# EAGLE board QRE1113 Line Sensor Breakout - Analog-Panelv12 (EAGLE 6.4), part 1 of 2
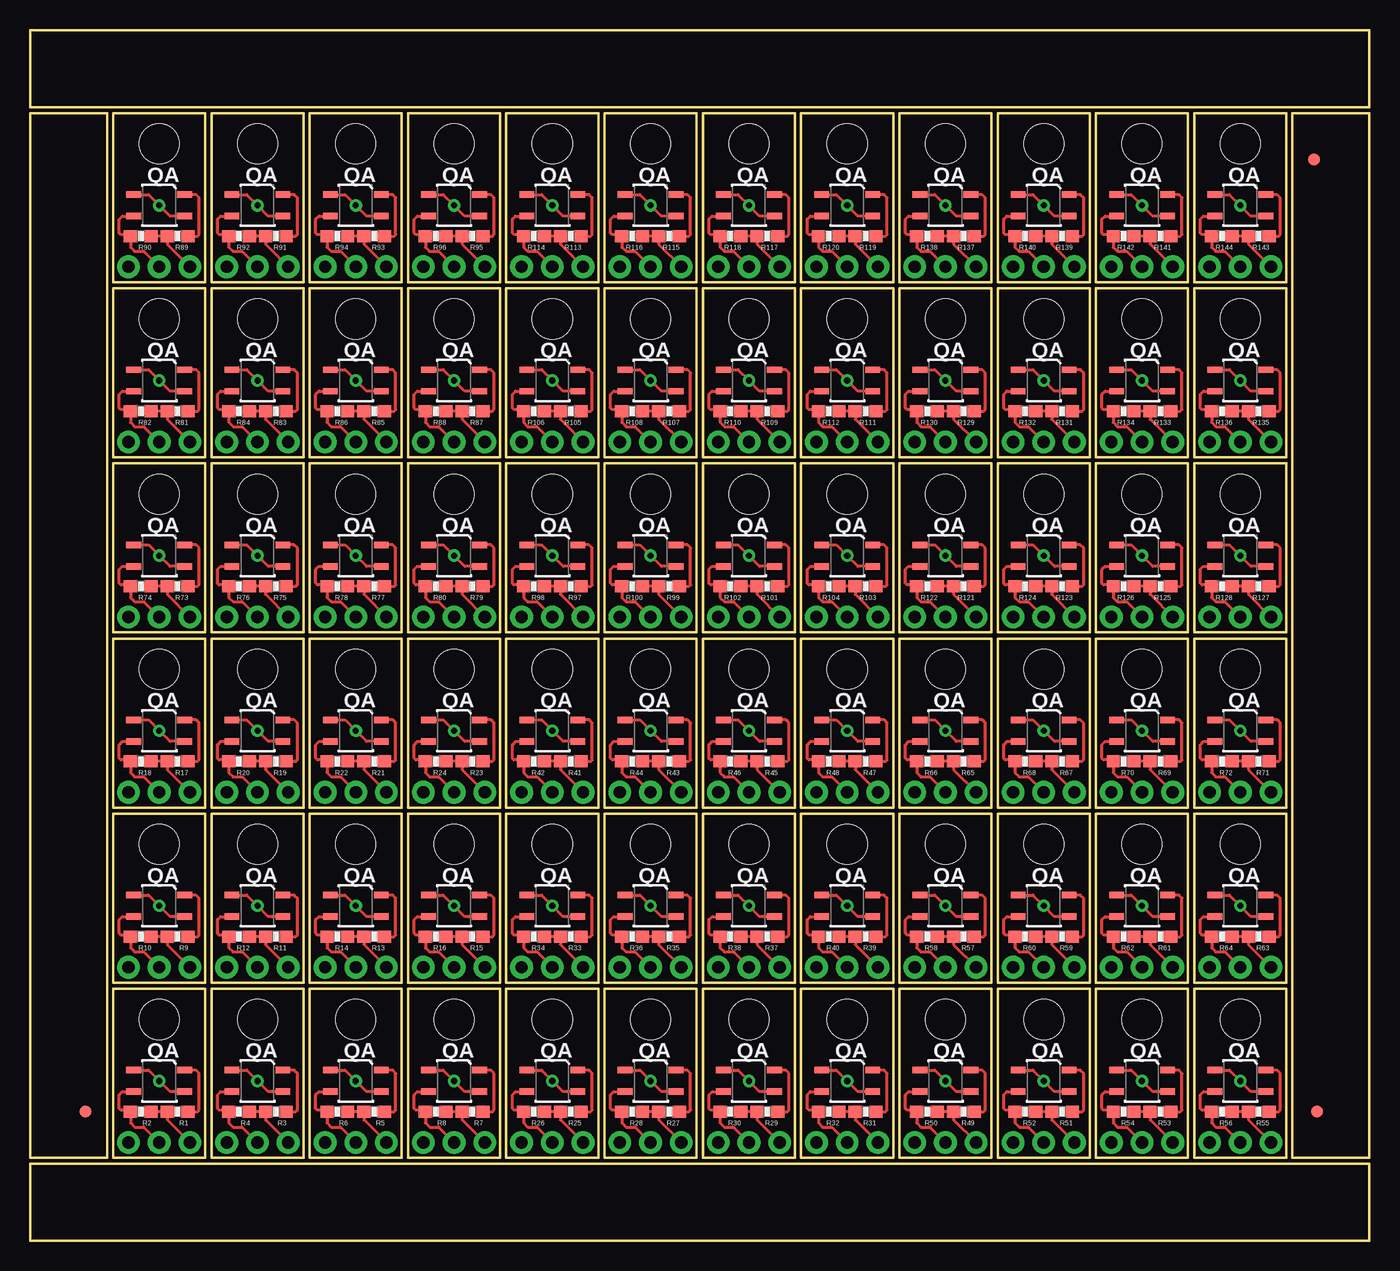
[diagram p0: board, top side]
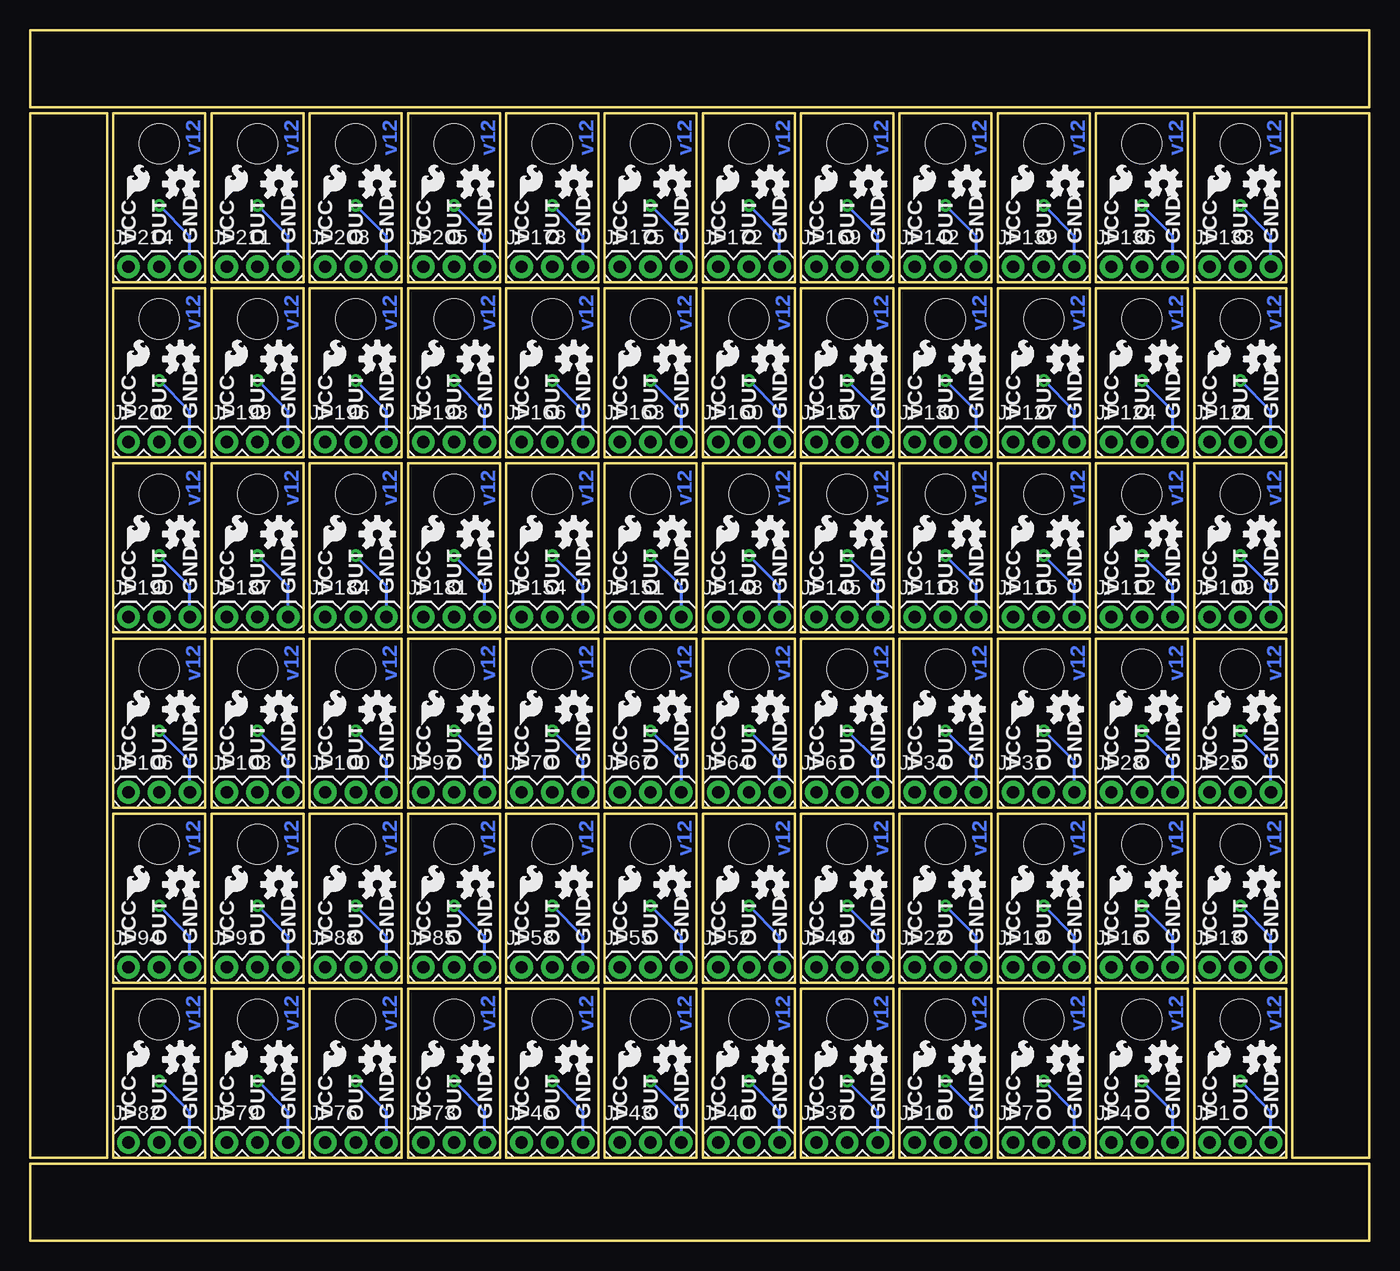
[diagram p1: board, bottom side, seen from below]

Size 110.74 x 100.08 mm. Coordinates in mm from the lower left corner, seen from the top.
Outline: 29.72,6.35 0,6.35 0,0 110.74,0 110.74,6.35 14.99,6.35
Outline: 81.03,93.73 110.74,93.73 110.74,100.08 0,100.08 0,93.73 95.76,93.73
Outline: 6.86,6.86 14.48,6.86 14.48,20.83 6.86,20.83 6.86,6.86
Outline: 14.99,6.86 22.61,6.86 22.61,20.83 14.99,20.83 14.99,6.86
Outline: 23.11,6.86 30.73,6.86 30.73,20.83 23.11,20.83 23.11,6.86
Outline: 31.24,6.86 38.86,6.86 38.86,20.83 31.24,20.83 31.24,6.86
Outline: 6.86,21.34 14.48,21.34 14.48,35.31 6.86,35.31 6.86,21.34
Outline: 14.99,21.34 22.61,21.34 22.61,35.31 14.99,35.31 14.99,21.34
Outline: 23.11,21.34 30.73,21.34 30.73,35.31 23.11,35.31 23.11,21.34
Outline: 31.24,21.34 38.86,21.34 38.86,35.31 31.24,35.31 31.24,21.34
Outline: 6.86,35.81 14.48,35.81 14.48,49.78 6.86,49.78 6.86,35.81
Outline: 14.99,35.81 22.61,35.81 22.61,49.78 14.99,49.78 14.99,35.81
Outline: 23.11,35.81 30.73,35.81 30.73,49.78 23.11,49.78 23.11,35.81
Outline: 31.24,35.81 38.86,35.81 38.86,49.78 31.24,49.78 31.24,35.81
Outline: 39.37,6.86 46.99,6.86 46.99,20.83 39.37,20.83 39.37,6.86
Outline: 47.5,6.86 55.12,6.86 55.12,20.83 47.5,20.83 47.5,6.86
Outline: 55.63,6.86 63.25,6.86 63.25,20.83 55.63,20.83 55.63,6.86
Outline: 63.75,6.86 71.37,6.86 71.37,20.83 63.75,20.83 63.75,6.86
Outline: 39.37,21.34 46.99,21.34 46.99,35.31 39.37,35.31 39.37,21.34
Outline: 47.5,21.34 55.12,21.34 55.12,35.31 47.5,35.31 47.5,21.34
Outline: 55.63,21.34 63.25,21.34 63.25,35.31 55.63,35.31 55.63,21.34
Outline: 63.75,21.34 71.37,21.34 71.37,35.31 63.75,35.31 63.75,21.34
Outline: 39.37,35.81 46.99,35.81 46.99,49.78 39.37,49.78 39.37,35.81
Outline: 47.5,35.81 55.12,35.81 55.12,49.78 47.5,49.78 47.5,35.81
Outline: 55.63,35.81 63.25,35.81 63.25,49.78 55.63,49.78 55.63,35.81
Outline: 63.75,35.81 71.37,35.81 71.37,49.78 63.75,49.78 63.75,35.81
Outline: 71.88,6.86 79.5,6.86 79.5,20.83 71.88,20.83 71.88,6.86
Outline: 80.01,6.86 87.63,6.86 87.63,20.83 80.01,20.83 80.01,6.86
Outline: 88.14,6.86 95.76,6.86 95.76,20.83 88.14,20.83 88.14,6.86
Outline: 96.27,6.86 103.89,6.86 103.89,20.83 96.27,20.83 96.27,6.86
Outline: 71.88,21.34 79.5,21.34 79.5,35.31 71.88,35.31 71.88,21.34
Outline: 80.01,21.34 87.63,21.34 87.63,35.31 80.01,35.31 80.01,21.34
Outline: 88.14,21.34 95.76,21.34 95.76,35.31 88.14,35.31 88.14,21.34
Outline: 96.27,21.34 103.89,21.34 103.89,35.31 96.27,35.31 96.27,21.34
Outline: 71.88,35.81 79.5,35.81 79.5,49.78 71.88,49.78 71.88,35.81
Outline: 80.01,35.81 87.63,35.81 87.63,49.78 80.01,49.78 80.01,35.81
Outline: 88.14,35.81 95.76,35.81 95.76,49.78 88.14,49.78 88.14,35.81
Outline: 96.27,35.81 103.89,35.81 103.89,49.78 96.27,49.78 96.27,35.81
Outline: 6.86,50.29 14.48,50.29 14.48,64.26 6.86,64.26 6.86,50.29
Outline: 14.99,50.29 22.61,50.29 22.61,64.26 14.99,64.26 14.99,50.29
Outline: 23.11,50.29 30.73,50.29 30.73,64.26 23.11,64.26 23.11,50.29
Outline: 31.24,50.29 38.86,50.29 38.86,64.26 31.24,64.26 31.24,50.29
Outline: 6.86,64.77 14.48,64.77 14.48,78.74 6.86,78.74 6.86,64.77
Outline: 14.99,64.77 22.61,64.77 22.61,78.74 14.99,78.74 14.99,64.77
Outline: 23.11,64.77 30.73,64.77 30.73,78.74 23.11,78.74 23.11,64.77
Outline: 31.24,64.77 38.86,64.77 38.86,78.74 31.24,78.74 31.24,64.77
Outline: 6.86,79.25 14.48,79.25 14.48,93.22 6.86,93.22 6.86,79.25
Outline: 14.99,79.25 22.61,79.25 22.61,93.22 14.99,93.22 14.99,79.25
Outline: 23.11,79.25 30.73,79.25 30.73,93.22 23.11,93.22 23.11,79.25
Outline: 31.24,79.25 38.86,79.25 38.86,93.22 31.24,93.22 31.24,79.25
Outline: 39.37,50.29 46.99,50.29 46.99,64.26 39.37,64.26 39.37,50.29
Outline: 47.5,50.29 55.12,50.29 55.12,64.26 47.5,64.26 47.5,50.29
Outline: 55.63,50.29 63.25,50.29 63.25,64.26 55.63,64.26 55.63,50.29
Outline: 63.75,50.29 71.37,50.29 71.37,64.26 63.75,64.26 63.75,50.29
Outline: 39.37,64.77 46.99,64.77 46.99,78.74 39.37,78.74 39.37,64.77
Outline: 47.5,64.77 55.12,64.77 55.12,78.74 47.5,78.74 47.5,64.77
Outline: 55.63,64.77 63.25,64.77 63.25,78.74 55.63,78.74 55.63,64.77
Outline: 63.75,64.77 71.37,64.77 71.37,78.74 63.75,78.74 63.75,64.77
Outline: 39.37,79.25 46.99,79.25 46.99,93.22 39.37,93.22 39.37,79.25
Outline: 47.5,79.25 55.12,79.25 55.12,93.22 47.5,93.22 47.5,79.25
Outline: 55.63,79.25 63.25,79.25 63.25,93.22 55.63,93.22 55.63,79.25
Outline: 63.75,79.25 71.37,79.25 71.37,93.22 63.75,93.22 63.75,79.25
Outline: 71.88,50.29 79.5,50.29 79.5,64.26 71.88,64.26 71.88,50.29
Outline: 80.01,50.29 87.63,50.29 87.63,64.26 80.01,64.26 80.01,50.29
Outline: 88.14,50.29 95.76,50.29 95.76,64.26 88.14,64.26 88.14,50.29
Outline: 96.27,50.29 103.89,50.29 103.89,64.26 96.27,64.26 96.27,50.29
Outline: 71.88,64.77 79.5,64.77 79.5,78.74 71.88,78.74 71.88,64.77
Outline: 80.01,64.77 87.63,64.77 87.63,78.74 80.01,78.74 80.01,64.77
Outline: 88.14,64.77 95.76,64.77 95.76,78.74 88.14,78.74 88.14,64.77
Outline: 96.27,64.77 103.89,64.77 103.89,78.74 96.27,78.74 96.27,64.77
Outline: 71.88,79.25 79.5,79.25 79.5,93.22 71.88,93.22 71.88,79.25
Outline: 80.01,79.25 87.63,79.25 87.63,93.22 80.01,93.22 80.01,79.25
Outline: 88.14,79.25 95.76,79.25 95.76,93.22 88.14,93.22 88.14,79.25
Outline: 96.27,79.25 103.89,79.25 103.89,93.22 96.27,93.22 96.27,79.25
Outline: 6.35,6.86 6.35,93.22 0,93.22 0,6.86 6.35,6.86
Outline: 110.74,6.86 110.74,93.22 104.39,93.22 104.39,6.86 110.74,6.86
Copper layers (1*16): Top 0.035mm / dielectric 1.5mm / Bottom 0.035mm
Design rules "SparkFun *": minimum track width 8mil, minimum drill 20mil, track to track 8mil, track to pad 8mil, pad to pad 8mil, via to via 8mil, smd to smd 8mil, copper to edge 9mil, drill to drill 8mil, minimum pad ring 12mil, minimum via ring 10mil, stop-mask expansion 4mil, vias tented up to drill 20mil, thermal gap 10mil

## Footprints (pad centres in the part's own frame; a part is rotated, then mirrored left to right if it is on the bottom)
FIDUCIAL-1X2 = smd 1 x 1: 1 0,0
1X03 = drill 1.016 pad 1.88: 1 0,0; 2 2.54,0; 3 5.08,0
STAND-OFF = hole 3.302: 0,0
0603-RES = smd 1.1 x 1: 1 -0.85,0; 2 0.85,0
QRE1113-1:1 = smd 1.219 x 0.533: 1 -2.108,-0.889; 2 2.108,-0.889; 3 2.108,0.889; 4 -2.108,0.889

## Placement (x,y rotation side)
E$1  [FIDUCIAL-1X2]  4.57,10.67 0 top
E$4  [FIDUCIAL-1X2]  106.43,10.67 0 top
E$5  [FIDUCIAL-1X2]  106.17,89.41 180 top
JP1  [1X03]  13.21,8.13 0 bottom
JP2  LOGO-SFESK  [SFE-LOGO-FLAME]  13.34,13.72 0 bottom
JP3  STAND-OFF  [STAND-OFF]  10.67,18.29 0 top
JP4  [1X03]  21.34,8.13 0 bottom
JP5  LOGO-SFESK  [SFE-LOGO-FLAME]  21.46,13.72 0 bottom
JP6  STAND-OFF  [STAND-OFF]  18.8,18.29 0 top
JP7  [1X03]  29.46,8.13 0 bottom
JP8  LOGO-SFESK  [SFE-LOGO-FLAME]  29.59,13.72 0 bottom
JP9  STAND-OFF  [STAND-OFF]  26.92,18.29 0 top
JP10  [1X03]  37.59,8.13 0 bottom
JP11  LOGO-SFESK  [SFE-LOGO-FLAME]  37.72,13.72 0 bottom
JP12  STAND-OFF  [STAND-OFF]  35.05,18.29 0 top
JP13  [1X03]  13.21,22.61 0 bottom
JP14  LOGO-SFESK  [SFE-LOGO-FLAME]  13.34,28.19 0 bottom
JP15  STAND-OFF  [STAND-OFF]  10.67,32.77 0 top
JP16  [1X03]  21.34,22.61 0 bottom
JP17  LOGO-SFESK  [SFE-LOGO-FLAME]  21.46,28.19 0 bottom
JP18  STAND-OFF  [STAND-OFF]  18.8,32.77 0 top
JP19  [1X03]  29.46,22.61 0 bottom
JP20  LOGO-SFESK  [SFE-LOGO-FLAME]  29.59,28.19 0 bottom
JP21  STAND-OFF  [STAND-OFF]  26.92,32.77 0 top
JP22  [1X03]  37.59,22.61 0 bottom
JP23  LOGO-SFESK  [SFE-LOGO-FLAME]  37.72,28.19 0 bottom
JP24  STAND-OFF  [STAND-OFF]  35.05,32.77 0 top
JP25  [1X03]  13.21,37.08 0 bottom
JP26  LOGO-SFESK  [SFE-LOGO-FLAME]  13.34,42.67 0 bottom
JP27  STAND-OFF  [STAND-OFF]  10.67,47.24 0 top
JP28  [1X03]  21.34,37.08 0 bottom
JP29  LOGO-SFESK  [SFE-LOGO-FLAME]  21.46,42.67 0 bottom
JP30  STAND-OFF  [STAND-OFF]  18.8,47.24 0 top
JP31  [1X03]  29.46,37.08 0 bottom
JP32  LOGO-SFESK  [SFE-LOGO-FLAME]  29.59,42.67 0 bottom
JP33  STAND-OFF  [STAND-OFF]  26.92,47.24 0 top
JP34  [1X03]  37.59,37.08 0 bottom
JP35  LOGO-SFESK  [SFE-LOGO-FLAME]  37.72,42.67 0 bottom
JP36  STAND-OFF  [STAND-OFF]  35.05,47.24 0 top
JP37  [1X03]  45.72,8.13 0 bottom
JP38  LOGO-SFESK  [SFE-LOGO-FLAME]  45.85,13.72 0 bottom
JP39  STAND-OFF  [STAND-OFF]  43.18,18.29 0 top
JP40  [1X03]  53.85,8.13 0 bottom
JP41  LOGO-SFESK  [SFE-LOGO-FLAME]  53.98,13.72 0 bottom
JP42  STAND-OFF  [STAND-OFF]  51.31,18.29 0 top
JP43  [1X03]  61.98,8.13 0 bottom
JP44  LOGO-SFESK  [SFE-LOGO-FLAME]  62.1,13.72 0 bottom
JP45  STAND-OFF  [STAND-OFF]  59.44,18.29 0 top
JP46  [1X03]  70.1,8.13 0 bottom
JP47  LOGO-SFESK  [SFE-LOGO-FLAME]  70.23,13.72 0 bottom
JP48  STAND-OFF  [STAND-OFF]  67.56,18.29 0 top
JP49  [1X03]  45.72,22.61 0 bottom
JP50  LOGO-SFESK  [SFE-LOGO-FLAME]  45.85,28.19 0 bottom
JP51  STAND-OFF  [STAND-OFF]  43.18,32.77 0 top
JP52  [1X03]  53.85,22.61 0 bottom
JP53  LOGO-SFESK  [SFE-LOGO-FLAME]  53.98,28.19 0 bottom
JP54  STAND-OFF  [STAND-OFF]  51.31,32.77 0 top
JP55  [1X03]  61.98,22.61 0 bottom
JP56  LOGO-SFESK  [SFE-LOGO-FLAME]  62.1,28.19 0 bottom
JP57  STAND-OFF  [STAND-OFF]  59.44,32.77 0 top
JP58  [1X03]  70.1,22.61 0 bottom
JP59  LOGO-SFESK  [SFE-LOGO-FLAME]  70.23,28.19 0 bottom
JP60  STAND-OFF  [STAND-OFF]  67.56,32.77 0 top
JP61  [1X03]  45.72,37.08 0 bottom
JP62  LOGO-SFESK  [SFE-LOGO-FLAME]  45.85,42.67 0 bottom
JP63  STAND-OFF  [STAND-OFF]  43.18,47.24 0 top
JP64  [1X03]  53.85,37.08 0 bottom
JP65  LOGO-SFESK  [SFE-LOGO-FLAME]  53.98,42.67 0 bottom
JP66  STAND-OFF  [STAND-OFF]  51.31,47.24 0 top
JP67  [1X03]  61.98,37.08 0 bottom
JP68  LOGO-SFESK  [SFE-LOGO-FLAME]  62.1,42.67 0 bottom
JP69  STAND-OFF  [STAND-OFF]  59.44,47.24 0 top
JP70  [1X03]  70.1,37.08 0 bottom
JP71  LOGO-SFESK  [SFE-LOGO-FLAME]  70.23,42.67 0 bottom
JP72  STAND-OFF  [STAND-OFF]  67.56,47.24 0 top
JP73  [1X03]  78.23,8.13 0 bottom
JP74  LOGO-SFESK  [SFE-LOGO-FLAME]  78.36,13.72 0 bottom
JP75  STAND-OFF  [STAND-OFF]  75.69,18.29 0 top
JP76  [1X03]  86.36,8.13 0 bottom
JP77  LOGO-SFESK  [SFE-LOGO-FLAME]  86.49,13.72 0 bottom
JP78  STAND-OFF  [STAND-OFF]  83.82,18.29 0 top
JP79  [1X03]  94.49,8.13 0 bottom
JP80  LOGO-SFESK  [SFE-LOGO-FLAME]  94.61,13.72 0 bottom
JP81  STAND-OFF  [STAND-OFF]  91.95,18.29 0 top
JP82  [1X03]  102.62,8.13 0 bottom
JP83  LOGO-SFESK  [SFE-LOGO-FLAME]  102.74,13.72 0 bottom
JP84  STAND-OFF  [STAND-OFF]  100.08,18.29 0 top
JP85  [1X03]  78.23,22.61 0 bottom
JP86  LOGO-SFESK  [SFE-LOGO-FLAME]  78.36,28.19 0 bottom
JP87  STAND-OFF  [STAND-OFF]  75.69,32.77 0 top
JP88  [1X03]  86.36,22.61 0 bottom
JP89  LOGO-SFESK  [SFE-LOGO-FLAME]  86.49,28.19 0 bottom
JP90  STAND-OFF  [STAND-OFF]  83.82,32.77 0 top
JP91  [1X03]  94.49,22.61 0 bottom
JP92  LOGO-SFESK  [SFE-LOGO-FLAME]  94.61,28.19 0 bottom
JP93  STAND-OFF  [STAND-OFF]  91.95,32.77 0 top
JP94  [1X03]  102.62,22.61 0 bottom
JP95  LOGO-SFESK  [SFE-LOGO-FLAME]  102.74,28.19 0 bottom
JP96  STAND-OFF  [STAND-OFF]  100.08,32.77 0 top
JP97  [1X03]  78.23,37.08 0 bottom
JP98  LOGO-SFESK  [SFE-LOGO-FLAME]  78.36,42.67 0 bottom
JP99  STAND-OFF  [STAND-OFF]  75.69,47.24 0 top
JP100  [1X03]  86.36,37.08 0 bottom
JP101  LOGO-SFESK  [SFE-LOGO-FLAME]  86.49,42.67 0 bottom
JP102  STAND-OFF  [STAND-OFF]  83.82,47.24 0 top
JP103  [1X03]  94.49,37.08 0 bottom
JP104  LOGO-SFESK  [SFE-LOGO-FLAME]  94.61,42.67 0 bottom
JP105  STAND-OFF  [STAND-OFF]  91.95,47.24 0 top
JP106  [1X03]  102.62,37.08 0 bottom
JP107  LOGO-SFESK  [SFE-LOGO-FLAME]  102.74,42.67 0 bottom
JP108  STAND-OFF  [STAND-OFF]  100.08,47.24 0 top
JP109  [1X03]  13.21,51.56 0 bottom
JP110  LOGO-SFESK  [SFE-LOGO-FLAME]  13.34,57.15 0 bottom
JP111  STAND-OFF  [STAND-OFF]  10.67,61.72 0 top
JP112  [1X03]  21.34,51.56 0 bottom
JP113  LOGO-SFESK  [SFE-LOGO-FLAME]  21.46,57.15 0 bottom
JP114  STAND-OFF  [STAND-OFF]  18.8,61.72 0 top
JP115  [1X03]  29.46,51.56 0 bottom
JP116  LOGO-SFESK  [SFE-LOGO-FLAME]  29.59,57.15 0 bottom
JP117  STAND-OFF  [STAND-OFF]  26.92,61.72 0 top
JP118  [1X03]  37.59,51.56 0 bottom
JP119  LOGO-SFESK  [SFE-LOGO-FLAME]  37.72,57.15 0 bottom
JP120  STAND-OFF  [STAND-OFF]  35.05,61.72 0 top
JP121  [1X03]  13.21,66.04 0 bottom
JP122  LOGO-SFESK  [SFE-LOGO-FLAME]  13.34,71.63 0 bottom
JP123  STAND-OFF  [STAND-OFF]  10.67,76.2 0 top
JP124  [1X03]  21.34,66.04 0 bottom
JP125  LOGO-SFESK  [SFE-LOGO-FLAME]  21.46,71.63 0 bottom
JP126  STAND-OFF  [STAND-OFF]  18.8,76.2 0 top
JP127  [1X03]  29.46,66.04 0 bottom
JP128  LOGO-SFESK  [SFE-LOGO-FLAME]  29.59,71.63 0 bottom
JP129  STAND-OFF  [STAND-OFF]  26.92,76.2 0 top
JP130  [1X03]  37.59,66.04 0 bottom
JP131  LOGO-SFESK  [SFE-LOGO-FLAME]  37.72,71.63 0 bottom
JP132  STAND-OFF  [STAND-OFF]  35.05,76.2 0 top
JP133  [1X03]  13.21,80.52 0 bottom
JP134  LOGO-SFESK  [SFE-LOGO-FLAME]  13.34,86.11 0 bottom
JP135  STAND-OFF  [STAND-OFF]  10.67,90.68 0 top
JP136  [1X03]  21.34,80.52 0 bottom
JP137  LOGO-SFESK  [SFE-LOGO-FLAME]  21.46,86.11 0 bottom
JP138  STAND-OFF  [STAND-OFF]  18.8,90.68 0 top
JP139  [1X03]  29.46,80.52 0 bottom
JP140  LOGO-SFESK  [SFE-LOGO-FLAME]  29.59,86.11 0 bottom
JP141  STAND-OFF  [STAND-OFF]  26.92,90.68 0 top
JP142  [1X03]  37.59,80.52 0 bottom
JP143  LOGO-SFESK  [SFE-LOGO-FLAME]  37.72,86.11 0 bottom
JP144  STAND-OFF  [STAND-OFF]  35.05,90.68 0 top
JP145  [1X03]  45.72,51.56 0 bottom
JP146  LOGO-SFESK  [SFE-LOGO-FLAME]  45.85,57.15 0 bottom
JP147  STAND-OFF  [STAND-OFF]  43.18,61.72 0 top
JP148  [1X03]  53.85,51.56 0 bottom
JP149  LOGO-SFESK  [SFE-LOGO-FLAME]  53.98,57.15 0 bottom
JP150  STAND-OFF  [STAND-OFF]  51.31,61.72 0 top
JP151  [1X03]  61.98,51.56 0 bottom
JP152  LOGO-SFESK  [SFE-LOGO-FLAME]  62.1,57.15 0 bottom
JP153  STAND-OFF  [STAND-OFF]  59.44,61.72 0 top
JP154  [1X03]  70.1,51.56 0 bottom
JP155  LOGO-SFESK  [SFE-LOGO-FLAME]  70.23,57.15 0 bottom
JP156  STAND-OFF  [STAND-OFF]  67.56,61.72 0 top
JP157  [1X03]  45.72,66.04 0 bottom
JP158  LOGO-SFESK  [SFE-LOGO-FLAME]  45.85,71.63 0 bottom
JP159  STAND-OFF  [STAND-OFF]  43.18,76.2 0 top
JP160  [1X03]  53.85,66.04 0 bottom
JP161  LOGO-SFESK  [SFE-LOGO-FLAME]  53.98,71.63 0 bottom
JP162  STAND-OFF  [STAND-OFF]  51.31,76.2 0 top
JP163  [1X03]  61.98,66.04 0 bottom
JP164  LOGO-SFESK  [SFE-LOGO-FLAME]  62.1,71.63 0 bottom
JP165  STAND-OFF  [STAND-OFF]  59.44,76.2 0 top
JP166  [1X03]  70.1,66.04 0 bottom
JP167  LOGO-SFESK  [SFE-LOGO-FLAME]  70.23,71.63 0 bottom
JP168  STAND-OFF  [STAND-OFF]  67.56,76.2 0 top
JP169  [1X03]  45.72,80.52 0 bottom
JP170  LOGO-SFESK  [SFE-LOGO-FLAME]  45.85,86.11 0 bottom
JP171  STAND-OFF  [STAND-OFF]  43.18,90.68 0 top
JP172  [1X03]  53.85,80.52 0 bottom
JP173  LOGO-SFESK  [SFE-LOGO-FLAME]  53.98,86.11 0 bottom
JP174  STAND-OFF  [STAND-OFF]  51.31,90.68 0 top
JP175  [1X03]  61.98,80.52 0 bottom
JP176  LOGO-SFESK  [SFE-LOGO-FLAME]  62.1,86.11 0 bottom
JP177  STAND-OFF  [STAND-OFF]  59.44,90.68 0 top
JP178  [1X03]  70.1,80.52 0 bottom
JP179  LOGO-SFESK  [SFE-LOGO-FLAME]  70.23,86.11 0 bottom
JP180  STAND-OFF  [STAND-OFF]  67.56,90.68 0 top
JP181  [1X03]  78.23,51.56 0 bottom
JP182  LOGO-SFESK  [SFE-LOGO-FLAME]  78.36,57.15 0 bottom
JP183  STAND-OFF  [STAND-OFF]  75.69,61.72 0 top
JP184  [1X03]  86.36,51.56 0 bottom
JP185  LOGO-SFESK  [SFE-LOGO-FLAME]  86.49,57.15 0 bottom
JP186  STAND-OFF  [STAND-OFF]  83.82,61.72 0 top
JP187  [1X03]  94.49,51.56 0 bottom
JP188  LOGO-SFESK  [SFE-LOGO-FLAME]  94.61,57.15 0 bottom
JP189  STAND-OFF  [STAND-OFF]  91.95,61.72 0 top
JP190  [1X03]  102.62,51.56 0 bottom
JP191  LOGO-SFESK  [SFE-LOGO-FLAME]  102.74,57.15 0 bottom
JP192  STAND-OFF  [STAND-OFF]  100.08,61.72 0 top
JP193  [1X03]  78.23,66.04 0 bottom
JP194  LOGO-SFESK  [SFE-LOGO-FLAME]  78.36,71.63 0 bottom
JP195  STAND-OFF  [STAND-OFF]  75.69,76.2 0 top
JP196  [1X03]  86.36,66.04 0 bottom
JP197  LOGO-SFESK  [SFE-LOGO-FLAME]  86.49,71.63 0 bottom
JP198  STAND-OFF  [STAND-OFF]  83.82,76.2 0 top
JP199  [1X03]  94.49,66.04 0 bottom
JP200  LOGO-SFESK  [SFE-LOGO-FLAME]  94.61,71.63 0 bottom
JP201  STAND-OFF  [STAND-OFF]  91.95,76.2 0 top
JP202  [1X03]  102.62,66.04 0 bottom
JP203  LOGO-SFESK  [SFE-LOGO-FLAME]  102.74,71.63 0 bottom
JP204  STAND-OFF  [STAND-OFF]  100.08,76.2 0 top
JP205  [1X03]  78.23,80.52 0 bottom
JP206  LOGO-SFESK  [SFE-LOGO-FLAME]  78.36,86.11 0 bottom
JP207  STAND-OFF  [STAND-OFF]  75.69,90.68 0 top
JP208  [1X03]  86.36,80.52 0 bottom
JP209  LOGO-SFESK  [SFE-LOGO-FLAME]  86.49,86.11 0 bottom
JP210  STAND-OFF  [STAND-OFF]  83.82,90.68 0 top
JP211  [1X03]  94.49,80.52 0 bottom
JP212  LOGO-SFESK  [SFE-LOGO-FLAME]  94.61,86.11 0 bottom
JP213  STAND-OFF  [STAND-OFF]  91.95,90.68 0 top
JP214  [1X03]  102.62,80.52 0 bottom
JP215  LOGO-SFESK  [SFE-LOGO-FLAME]  102.74,86.11 0 bottom
JP216  STAND-OFF  [STAND-OFF]  100.08,90.68 0 top
R1  100  [0603-RES]  12.19,10.67 180 top
R2  10K  [0603-RES]  9.14,10.67 180 top
R3  100  [0603-RES]  20.32,10.67 180 top
R4  10K  [0603-RES]  17.27,10.67 180 top
R5  100  [0603-RES]  28.45,10.67 180 top
R6  10K  [0603-RES]  25.4,10.67 180 top
R7  100  [0603-RES]  36.58,10.67 180 top
R8  10K  [0603-RES]  33.53,10.67 180 top
R9  100  [0603-RES]  12.19,25.15 180 top
R10  10K  [0603-RES]  9.14,25.15 180 top
R11  100  [0603-RES]  20.32,25.15 180 top
R12  10K  [0603-RES]  17.27,25.15 180 top
R13  100  [0603-RES]  28.45,25.15 180 top
R14  10K  [0603-RES]  25.4,25.15 180 top
R15  100  [0603-RES]  36.58,25.15 180 top
R16  10K  [0603-RES]  33.53,25.15 180 top
R17  100  [0603-RES]  12.19,39.62 180 top
R18  10K  [0603-RES]  9.14,39.62 180 top
R19  100  [0603-RES]  20.32,39.62 180 top
R20  10K  [0603-RES]  17.27,39.62 180 top
R21  100  [0603-RES]  28.45,39.62 180 top
R22  10K  [0603-RES]  25.4,39.62 180 top
R23  100  [0603-RES]  36.58,39.62 180 top
R24  10K  [0603-RES]  33.53,39.62 180 top
R25  100  [0603-RES]  44.7,10.67 180 top
R26  10K  [0603-RES]  41.66,10.67 180 top
R27  100  [0603-RES]  52.83,10.67 180 top
R28  10K  [0603-RES]  49.78,10.67 180 top
R29  100  [0603-RES]  60.96,10.67 180 top
R30  10K  [0603-RES]  57.91,10.67 180 top
R31  100  [0603-RES]  69.09,10.67 180 top
R32  10K  [0603-RES]  66.04,10.67 180 top
R33  100  [0603-RES]  44.7,25.15 180 top
R34  10K  [0603-RES]  41.66,25.15 180 top
R35  100  [0603-RES]  52.83,25.15 180 top
R36  10K  [0603-RES]  49.78,25.15 180 top
R37  100  [0603-RES]  60.96,25.15 180 top
R38  10K  [0603-RES]  57.91,25.15 180 top
R39  100  [0603-RES]  69.09,25.15 180 top
R40  10K  [0603-RES]  66.04,25.15 180 top
R41  100  [0603-RES]  44.7,39.62 180 top
R42  10K  [0603-RES]  41.66,39.62 180 top
R43  100  [0603-RES]  52.83,39.62 180 top
R44  10K  [0603-RES]  49.78,39.62 180 top
R45  100  [0603-RES]  60.96,39.62 180 top
R46  10K  [0603-RES]  57.91,39.62 180 top
R47  100  [0603-RES]  69.09,39.62 180 top
R48  10K  [0603-RES]  66.04,39.62 180 top
R49  100  [0603-RES]  77.22,10.67 180 top
R50  10K  [0603-RES]  74.17,10.67 180 top
R51  100  [0603-RES]  85.34,10.67 180 top
R52  10K  [0603-RES]  82.3,10.67 180 top
R53  100  [0603-RES]  93.47,10.67 180 top
R54  10K  [0603-RES]  90.42,10.67 180 top
R55  100  [0603-RES]  101.6,10.67 180 top
R56  10K  [0603-RES]  98.55,10.67 180 top
R57  100  [0603-RES]  77.22,25.15 180 top
R58  10K  [0603-RES]  74.17,25.15 180 top
R59  100  [0603-RES]  85.34,25.15 180 top
R60  10K  [0603-RES]  82.3,25.15 180 top
R61  100  [0603-RES]  93.47,25.15 180 top
R62  10K  [0603-RES]  90.42,25.15 180 top
R63  100  [0603-RES]  101.6,25.15 180 top
R64  10K  [0603-RES]  98.55,25.15 180 top
R65  100  [0603-RES]  77.22,39.62 180 top
R66  10K  [0603-RES]  74.17,39.62 180 top
R67  100  [0603-RES]  85.34,39.62 180 top
R68  10K  [0603-RES]  82.3,39.62 180 top
R69  100  [0603-RES]  93.47,39.62 180 top
R70  10K  [0603-RES]  90.42,39.62 180 top
R71  100  [0603-RES]  101.6,39.62 180 top
R72  10K  [0603-RES]  98.55,39.62 180 top
R73  100  [0603-RES]  12.19,54.1 180 top
R74  10K  [0603-RES]  9.14,54.1 180 top
R75  100  [0603-RES]  20.32,54.1 180 top
R76  10K  [0603-RES]  17.27,54.1 180 top
R77  100  [0603-RES]  28.45,54.1 180 top
R78  10K  [0603-RES]  25.4,54.1 180 top
R79  100  [0603-RES]  36.58,54.1 180 top
R80  10K  [0603-RES]  33.53,54.1 180 top
R81  100  [0603-RES]  12.19,68.58 180 top
R82  10K  [0603-RES]  9.14,68.58 180 top
R83  100  [0603-RES]  20.32,68.58 180 top
R84  10K  [0603-RES]  17.27,68.58 180 top
R85  100  [0603-RES]  28.45,68.58 180 top
R86  10K  [0603-RES]  25.4,68.58 180 top
R87  100  [0603-RES]  36.58,68.58 180 top
R88  10K  [0603-RES]  33.53,68.58 180 top
R89  100  [0603-RES]  12.19,83.06 180 top
R90  10K  [0603-RES]  9.14,83.06 180 top
R91  100  [0603-RES]  20.32,83.06 180 top
R92  10K  [0603-RES]  17.27,83.06 180 top
R93  100  [0603-RES]  28.45,83.06 180 top
R94  10K  [0603-RES]  25.4,83.06 180 top
R95  100  [0603-RES]  36.58,83.06 180 top
R96  10K  [0603-RES]  33.53,83.06 180 top
R97  100  [0603-RES]  44.7,54.1 180 top
R98  10K  [0603-RES]  41.66,54.1 180 top
R99  100  [0603-RES]  52.83,54.1 180 top
R100  10K  [0603-RES]  49.78,54.1 180 top
R101  100  [0603-RES]  60.96,54.1 180 top
R102  10K  [0603-RES]  57.91,54.1 180 top
R103  100  [0603-RES]  69.09,54.1 180 top
R104  10K  [0603-RES]  66.04,54.1 180 top
R105  100  [0603-RES]  44.7,68.58 180 top
R106  10K  [0603-RES]  41.66,68.58 180 top
R107  100  [0603-RES]  52.83,68.58 180 top
R108  10K  [0603-RES]  49.78,68.58 180 top
R109  100  [0603-RES]  60.96,68.58 180 top
R110  10K  [0603-RES]  57.91,68.58 180 top
R111  100  [0603-RES]  69.09,68.58 180 top
R112  10K  [0603-RES]  66.04,68.58 180 top
R113  100  [0603-RES]  44.7,83.06 180 top
R114  10K  [0603-RES]  41.66,83.06 180 top
R115  100  [0603-RES]  52.83,83.06 180 top
R116  10K  [0603-RES]  49.78,83.06 180 top
R117  100  [0603-RES]  60.96,83.06 180 top
R118  10K  [0603-RES]  57.91,83.06 180 top
R119  100  [0603-RES]  69.09,83.06 180 top
R120  10K  [0603-RES]  66.04,83.06 180 top
R121  100  [0603-RES]  77.22,54.1 180 top
R122  10K  [0603-RES]  74.17,54.1 180 top
R123  100  [0603-RES]  85.34,54.1 180 top
R124  10K  [0603-RES]  82.3,54.1 180 top
R125  100  [0603-RES]  93.47,54.1 180 top
R126  10K  [0603-RES]  90.42,54.1 180 top
R127  100  [0603-RES]  101.6,54.1 180 top
R128  10K  [0603-RES]  98.55,54.1 180 top
R129  100  [0603-RES]  77.22,68.58 180 top
R130  10K  [0603-RES]  74.17,68.58 180 top
R131  100  [0603-RES]  85.34,68.58 180 top
R132  10K  [0603-RES]  82.3,68.58 180 top
R133  100  [0603-RES]  93.47,68.58 180 top
R134  10K  [0603-RES]  90.42,68.58 180 top
R135  100  [0603-RES]  101.6,68.58 180 top
R136  10K  [0603-RES]  98.55,68.58 180 top
R137  100  [0603-RES]  77.22,83.06 180 top
R138  10K  [0603-RES]  74.17,83.06 180 top
R139  100  [0603-RES]  85.34,83.06 180 top
R140  10K  [0603-RES]  82.3,83.06 180 top
R141  100  [0603-RES]  93.47,83.06 180 top
R142  10K  [0603-RES]  90.42,83.06 180 top
R143  100  [0603-RES]  101.6,83.06 180 top
R144  10K  [0603-RES]  98.55,83.06 180 top
U1  QRE11131:1  [QRE1113-1:1]  10.67,13.21 180 top
U2  QRE11131:1  [QRE1113-1:1]  18.8,13.21 180 top
U3  QRE11131:1  [QRE1113-1:1]  26.92,13.21 180 top
U4  QRE11131:1  [QRE1113-1:1]  35.05,13.21 180 top
U5  QRE11131:1  [QRE1113-1:1]  10.67,27.69 180 top
U6  QRE11131:1  [QRE1113-1:1]  18.8,27.69 180 top
U7  QRE11131:1  [QRE1113-1:1]  26.92,27.69 180 top
U8  QRE11131:1  [QRE1113-1:1]  35.05,27.69 180 top
U9  QRE11131:1  [QRE1113-1:1]  10.67,42.16 180 top
U10  QRE11131:1  [QRE1113-1:1]  18.8,42.16 180 top
U11  QRE11131:1  [QRE1113-1:1]  26.92,42.16 180 top
U12  QRE11131:1  [QRE1113-1:1]  35.05,42.16 180 top
U13  QRE11131:1  [QRE1113-1:1]  43.18,13.21 180 top
U14  QRE11131:1  [QRE1113-1:1]  51.31,13.21 180 top
U15  QRE11131:1  [QRE1113-1:1]  59.44,13.21 180 top
U16  QRE11131:1  [QRE1113-1:1]  67.56,13.21 180 top
U17  QRE11131:1  [QRE1113-1:1]  43.18,27.69 180 top
U18  QRE11131:1  [QRE1113-1:1]  51.31,27.69 180 top
U19  QRE11131:1  [QRE1113-1:1]  59.44,27.69 180 top
U20  QRE11131:1  [QRE1113-1:1]  67.56,27.69 180 top
U21  QRE11131:1  [QRE1113-1:1]  43.18,42.16 180 top
U22  QRE11131:1  [QRE1113-1:1]  51.31,42.16 180 top
U23  QRE11131:1  [QRE1113-1:1]  59.44,42.16 180 top
U24  QRE11131:1  [QRE1113-1:1]  67.56,42.16 180 top
U25  QRE11131:1  [QRE1113-1:1]  75.69,13.21 180 top
U26  QRE11131:1  [QRE1113-1:1]  83.82,13.21 180 top
U27  QRE11131:1  [QRE1113-1:1]  91.95,13.21 180 top
U28  QRE11131:1  [QRE1113-1:1]  100.08,13.21 180 top
U29  QRE11131:1  [QRE1113-1:1]  75.69,27.69 180 top
U30  QRE11131:1  [QRE1113-1:1]  83.82,27.69 180 top
U31  QRE11131:1  [QRE1113-1:1]  91.95,27.69 180 top
U32  QRE11131:1  [QRE1113-1:1]  100.08,27.69 180 top
U33  QRE11131:1  [QRE1113-1:1]  75.69,42.16 180 top
U34  QRE11131:1  [QRE1113-1:1]  83.82,42.16 180 top
U35  QRE11131:1  [QRE1113-1:1]  91.95,42.16 180 top
U36  QRE11131:1  [QRE1113-1:1]  100.08,42.16 180 top
U37  QRE11131:1  [QRE1113-1:1]  10.67,56.64 180 top
U38  QRE11131:1  [QRE1113-1:1]  18.8,56.64 180 top
U39  QRE11131:1  [QRE1113-1:1]  26.92,56.64 180 top
U40  QRE11131:1  [QRE1113-1:1]  35.05,56.64 180 top
U41  QRE11131:1  [QRE1113-1:1]  10.67,71.12 180 top
U42  QRE11131:1  [QRE1113-1:1]  18.8,71.12 180 top
U43  QRE11131:1  [QRE1113-1:1]  26.92,71.12 180 top
U44  QRE11131:1  [QRE1113-1:1]  35.05,71.12 180 top
U45  QRE11131:1  [QRE1113-1:1]  10.67,85.6 180 top
U46  QRE11131:1  [QRE1113-1:1]  18.8,85.6 180 top
U47  QRE11131:1  [QRE1113-1:1]  26.92,85.6 180 top
U48  QRE11131:1  [QRE1113-1:1]  35.05,85.6 180 top
U49  QRE11131:1  [QRE1113-1:1]  43.18,56.64 180 top
U50  QRE11131:1  [QRE1113-1:1]  51.31,56.64 180 top
U51  QRE11131:1  [QRE1113-1:1]  59.44,56.64 180 top
U52  QRE11131:1  [QRE1113-1:1]  67.56,56.64 180 top
U53  QRE11131:1  [QRE1113-1:1]  43.18,71.12 180 top
U54  QRE11131:1  [QRE1113-1:1]  51.31,71.12 180 top
U55  QRE11131:1  [QRE1113-1:1]  59.44,71.12 180 top
U56  QRE11131:1  [QRE1113-1:1]  67.56,71.12 180 top
U57  QRE11131:1  [QRE1113-1:1]  43.18,85.6 180 top
U58  QRE11131:1  [QRE1113-1:1]  51.31,85.6 180 top
U59  QRE11131:1  [QRE1113-1:1]  59.44,85.6 180 top
U60  QRE11131:1  [QRE1113-1:1]  67.56,85.6 180 top
U61  QRE11131:1  [QRE1113-1:1]  75.69,56.64 180 top
U62  QRE11131:1  [QRE1113-1:1]  83.82,56.64 180 top
U63  QRE11131:1  [QRE1113-1:1]  91.95,56.64 180 top
U64  QRE11131:1  [QRE1113-1:1]  100.08,56.64 180 top
U65  QRE11131:1  [QRE1113-1:1]  75.69,71.12 180 top
U66  QRE11131:1  [QRE1113-1:1]  83.82,71.12 180 top
U67  QRE11131:1  [QRE1113-1:1]  91.95,71.12 180 top
U68  QRE11131:1  [QRE1113-1:1]  100.08,71.12 180 top
U69  QRE11131:1  [QRE1113-1:1]  75.69,85.6 180 top
U70  QRE11131:1  [QRE1113-1:1]  83.82,85.6 180 top
U71  QRE11131:1  [QRE1113-1:1]  91.95,85.6 180 top
U72  QRE11131:1  [QRE1113-1:1]  100.08,85.6 180 top
U$1  OSHW-LOGOS  [OSHW-LOGO-S]  8.89,14.99 0 bottom
U$2  OSHW-LOGOS  [OSHW-LOGO-S]  17.02,14.99 0 bottom
U$3  OSHW-LOGOS  [OSHW-LOGO-S]  25.15,14.99 0 bottom
U$4  OSHW-LOGOS  [OSHW-LOGO-S]  33.27,14.99 0 bottom
U$5  OSHW-LOGOS  [OSHW-LOGO-S]  8.89,29.46 0 bottom
U$6  OSHW-LOGOS  [OSHW-LOGO-S]  17.02,29.46 0 bottom
U$7  OSHW-LOGOS  [OSHW-LOGO-S]  25.15,29.46 0 bottom
U$8  OSHW-LOGOS  [OSHW-LOGO-S]  33.27,29.46 0 bottom
U$9  OSHW-LOGOS  [OSHW-LOGO-S]  8.89,43.94 0 bottom
U$10  OSHW-LOGOS  [OSHW-LOGO-S]  17.02,43.94 0 bottom
U$11  OSHW-LOGOS  [OSHW-LOGO-S]  25.15,43.94 0 bottom
U$12  OSHW-LOGOS  [OSHW-LOGO-S]  33.27,43.94 0 bottom
U$13  OSHW-LOGOS  [OSHW-LOGO-S]  41.4,14.99 0 bottom
U$14  OSHW-LOGOS  [OSHW-LOGO-S]  49.53,14.99 0 bottom
U$15  OSHW-LOGOS  [OSHW-LOGO-S]  57.66,14.99 0 bottom
U$16  OSHW-LOGOS  [OSHW-LOGO-S]  65.79,14.99 0 bottom
U$17  OSHW-LOGOS  [OSHW-LOGO-S]  41.4,29.46 0 bottom
U$18  OSHW-LOGOS  [OSHW-LOGO-S]  49.53,29.46 0 bottom
U$19  OSHW-LOGOS  [OSHW-LOGO-S]  57.66,29.46 0 bottom
U$20  OSHW-LOGOS  [OSHW-LOGO-S]  65.79,29.46 0 bottom
U$21  OSHW-LOGOS  [OSHW-LOGO-S]  41.4,43.94 0 bottom
U$22  OSHW-LOGOS  [OSHW-LOGO-S]  49.53,43.94 0 bottom
U$23  OSHW-LOGOS  [OSHW-LOGO-S]  57.66,43.94 0 bottom
U$24  OSHW-LOGOS  [OSHW-LOGO-S]  65.79,43.94 0 bottom
U$25  OSHW-LOGOS  [OSHW-LOGO-S]  73.91,14.99 0 bottom
U$26  OSHW-LOGOS  [OSHW-LOGO-S]  82.04,14.99 0 bottom
U$27  OSHW-LOGOS  [OSHW-LOGO-S]  90.17,14.99 0 bottom
U$28  OSHW-LOGOS  [OSHW-LOGO-S]  98.3,14.99 0 bottom
U$29  OSHW-LOGOS  [OSHW-LOGO-S]  73.91,29.46 0 bottom
U$30  OSHW-LOGOS  [OSHW-LOGO-S]  82.04,29.46 0 bottom
U$31  OSHW-LOGOS  [OSHW-LOGO-S]  90.17,29.46 0 bottom
U$32  OSHW-LOGOS  [OSHW-LOGO-S]  98.3,29.46 0 bottom
U$33  OSHW-LOGOS  [OSHW-LOGO-S]  73.91,43.94 0 bottom
U$34  OSHW-LOGOS  [OSHW-LOGO-S]  82.04,43.94 0 bottom
U$35  OSHW-LOGOS  [OSHW-LOGO-S]  90.17,43.94 0 bottom
U$36  OSHW-LOGOS  [OSHW-LOGO-S]  98.3,43.94 0 bottom
U$37  OSHW-LOGOS  [OSHW-LOGO-S]  8.89,58.42 0 bottom
U$38  OSHW-LOGOS  [OSHW-LOGO-S]  17.02,58.42 0 bottom
U$39  OSHW-LOGOS  [OSHW-LOGO-S]  25.15,58.42 0 bottom
U$40  OSHW-LOGOS  [OSHW-LOGO-S]  33.27,58.42 0 bottom
U$41  OSHW-LOGOS  [OSHW-LOGO-S]  8.89,72.9 0 bottom
U$42  OSHW-LOGOS  [OSHW-LOGO-S]  17.02,72.9 0 bottom
U$43  OSHW-LOGOS  [OSHW-LOGO-S]  25.15,72.9 0 bottom
U$44  OSHW-LOGOS  [OSHW-LOGO-S]  33.27,72.9 0 bottom
U$45  OSHW-LOGOS  [OSHW-LOGO-S]  8.89,87.38 0 bottom
U$46  OSHW-LOGOS  [OSHW-LOGO-S]  17.02,87.38 0 bottom
U$47  OSHW-LOGOS  [OSHW-LOGO-S]  25.15,87.38 0 bottom
U$48  OSHW-LOGOS  [OSHW-LOGO-S]  33.27,87.38 0 bottom
U$49  OSHW-LOGOS  [OSHW-LOGO-S]  41.4,58.42 0 bottom
U$50  OSHW-LOGOS  [OSHW-LOGO-S]  49.53,58.42 0 bottom
U$51  OSHW-LOGOS  [OSHW-LOGO-S]  57.66,58.42 0 bottom
U$52  OSHW-LOGOS  [OSHW-LOGO-S]  65.79,58.42 0 bottom
U$53  OSHW-LOGOS  [OSHW-LOGO-S]  41.4,72.9 0 bottom
U$54  OSHW-LOGOS  [OSHW-LOGO-S]  49.53,72.9 0 bottom
U$55  OSHW-LOGOS  [OSHW-LOGO-S]  57.66,72.9 0 bottom
U$56  OSHW-LOGOS  [OSHW-LOGO-S]  65.79,72.9 0 bottom
U$57  OSHW-LOGOS  [OSHW-LOGO-S]  41.4,87.38 0 bottom
U$58  OSHW-LOGOS  [OSHW-LOGO-S]  49.53,87.38 0 bottom
U$59  OSHW-LOGOS  [OSHW-LOGO-S]  57.66,87.38 0 bottom
U$60  OSHW-LOGOS  [OSHW-LOGO-S]  65.79,87.38 0 bottom
U$61  OSHW-LOGOS  [OSHW-LOGO-S]  73.91,58.42 0 bottom
U$62  OSHW-LOGOS  [OSHW-LOGO-S]  82.04,58.42 0 bottom
U$63  OSHW-LOGOS  [OSHW-LOGO-S]  90.17,58.42 0 bottom
U$64  OSHW-LOGOS  [OSHW-LOGO-S]  98.3,58.42 0 bottom
U$65  OSHW-LOGOS  [OSHW-LOGO-S]  73.91,72.9 0 bottom
U$66  OSHW-LOGOS  [OSHW-LOGO-S]  82.04,72.9 0 bottom
U$67  OSHW-LOGOS  [OSHW-LOGO-S]  90.17,72.9 0 bottom
U$68  OSHW-LOGOS  [OSHW-LOGO-S]  98.3,72.9 0 bottom
U$69  OSHW-LOGOS  [OSHW-LOGO-S]  73.91,87.38 0 bottom
U$70  OSHW-LOGOS  [OSHW-LOGO-S]  82.04,87.38 0 bottom
U$71  OSHW-LOGOS  [OSHW-LOGO-S]  90.17,87.38 0 bottom
U$72  OSHW-LOGOS  [OSHW-LOGO-S]  98.3,87.38 0 bottom

## Library data of the parts
E$1 E$4 E$5 = SparkFun-Aesthetics
JP1-JP216 R1-R144 U$1-U$72 = SparkFun
U1-U72 = Testing

## Nets
GND: JP1.3 U1.2 U1.4
GND1: JP4.3 U2.2 U2.4
GND2: JP7.3 U3.2 U3.4
GND3: JP10.3 U4.2 U4.4
GND4: JP13.3 U5.2 U5.4
GND5: JP16.3 U6.2 U6.4
GND6: JP19.3 U7.2 U7.4
GND7: JP22.3 U8.2 U8.4
GND8: JP25.3 U9.2 U9.4
GND9: JP28.3 U10.2 U10.4
GND10: JP31.3 U11.2 U11.4
GND11: JP34.3 U12.2 U12.4
GND12: JP37.3 U13.2 U13.4
GND13: JP40.3 U14.2 U14.4
GND14: JP43.3 U15.2 U15.4
GND15: JP46.3 U16.2 U16.4
GND16: JP49.3 U17.2 U17.4
GND17: JP52.3 U18.2 U18.4
GND18: JP55.3 U19.2 U19.4
GND19: JP58.3 U20.2 U20.4
GND20: JP61.3 U21.2 U21.4
GND21: JP64.3 U22.2 U22.4
GND22: JP67.3 U23.2 U23.4
GND23: JP70.3 U24.2 U24.4
GND24: JP73.3 U25.2 U25.4
GND25: JP76.3 U26.2 U26.4
GND26: JP79.3 U27.2 U27.4
GND27: JP82.3 U28.2 U28.4
GND28: JP85.3 U29.2 U29.4
GND29: JP88.3 U30.2 U30.4
GND30: JP91.3 U31.2 U31.4
GND31: JP94.3 U32.2 U32.4
GND32: JP97.3 U33.2 U33.4
GND33: JP100.3 U34.2 U34.4
GND34: JP103.3 U35.2 U35.4
GND35: JP106.3 U36.2 U36.4
GND36: JP109.3 U37.2 U37.4
GND37: JP112.3 U38.2 U38.4
GND38: JP115.3 U39.2 U39.4
GND39: JP118.3 U40.2 U40.4
GND40: JP121.3 U41.2 U41.4
GND41: JP124.3 U42.2 U42.4
GND42: JP127.3 U43.2 U43.4
GND43: JP130.3 U44.2 U44.4
GND44: JP133.3 U45.2 U45.4
GND45: JP136.3 U46.2 U46.4
GND46: JP139.3 U47.2 U47.4
GND47: JP142.3 U48.2 U48.4
GND48: JP145.3 U49.2 U49.4
GND49: JP148.3 U50.2 U50.4
GND50: JP151.3 U51.2 U51.4
GND51: JP154.3 U52.2 U52.4
GND52: JP157.3 U53.2 U53.4
GND53: JP160.3 U54.2 U54.4
GND54: JP163.3 U55.2 U55.4
GND55: JP166.3 U56.2 U56.4
GND56: JP169.3 U57.2 U57.4
GND57: JP172.3 U58.2 U58.4
GND58: JP175.3 U59.2 U59.4
GND59: JP178.3 U60.2 U60.4
GND60: JP181.3 U61.2 U61.4
GND61: JP184.3 U62.2 U62.4
GND62: JP187.3 U63.2 U63.4
GND63: JP190.3 U64.2 U64.4
GND64: JP193.3 U65.2 U65.4
GND65: JP196.3 U66.2 U66.4
GND66: JP199.3 U67.2 U67.4
GND67: JP202.3 U68.2 U68.4
GND68: JP205.3 U69.2 U69.4
GND69: JP208.3 U70.2 U70.4
GND70: JP211.3 U71.2 U71.4
GND71: JP214.3 U72.2 U72.4
N$1: R1.1 U1.1
N$2: R3.1 U2.1
N$3: R5.1 U3.1
N$4: R7.1 U4.1
N$5: R9.1 U5.1
N$6: R11.1 U6.1
N$7: R13.1 U7.1
N$8: R15.1 U8.1
N$9: R17.1 U9.1
N$10: R19.1 U10.1
N$11: R21.1 U11.1
N$12: R23.1 U12.1
N$13: R25.1 U13.1
N$14: R27.1 U14.1
N$15: R29.1 U15.1
N$16: R31.1 U16.1
N$17: R33.1 U17.1
N$18: R35.1 U18.1
N$19: R37.1 U19.1
N$20: R39.1 U20.1
N$21: R41.1 U21.1
N$22: R43.1 U22.1
N$23: R45.1 U23.1
N$24: R47.1 U24.1
N$25: R49.1 U25.1
N$26: R51.1 U26.1
N$27: R53.1 U27.1
N$28: R55.1 U28.1
N$29: R57.1 U29.1
N$30: R59.1 U30.1
N$31: R61.1 U31.1
N$32: R63.1 U32.1
N$33: R65.1 U33.1
N$34: R67.1 U34.1
N$35: R69.1 U35.1
N$36: R71.1 U36.1
N$37: R73.1 U37.1
N$38: R75.1 U38.1
N$39: R77.1 U39.1
N$40: R79.1 U40.1
N$41: R81.1 U41.1
N$42: R83.1 U42.1
N$43: R85.1 U43.1
N$44: R87.1 U44.1
N$45: R89.1 U45.1
N$46: R91.1 U46.1
N$47: R93.1 U47.1
N$48: R95.1 U48.1
N$49: R97.1 U49.1
N$50: R99.1 U50.1
N$51: R101.1 U51.1
N$52: R103.1 U52.1
N$53: R105.1 U53.1
N$54: R107.1 U54.1
N$55: R109.1 U55.1
N$56: R111.1 U56.1
N$57: R113.1 U57.1
N$58: R115.1 U58.1
N$59: R117.1 U59.1
N$60: R119.1 U60.1
N$61: R121.1 U61.1
N$62: R123.1 U62.1
N$63: R125.1 U63.1
N$64: R127.1 U64.1
N$65: R129.1 U65.1
N$66: R131.1 U66.1
N$67: R133.1 U67.1
N$68: R135.1 U68.1
N$69: R137.1 U69.1
N$70: R139.1 U70.1
N$71: R141.1 U71.1
N$72: R143.1 U72.1
OUT: JP1.2 R2.2 U1.3
OUT1: JP4.2 R4.2 U2.3
OUT2: JP7.2 R6.2 U3.3
OUT3: JP10.2 R8.2 U4.3
OUT4: JP13.2 R10.2 U5.3
OUT5: JP16.2 R12.2 U6.3
OUT6: JP19.2 R14.2 U7.3
OUT7: JP22.2 R16.2 U8.3
OUT8: JP25.2 R18.2 U9.3
OUT9: JP28.2 R20.2 U10.3
OUT10: JP31.2 R22.2 U11.3
OUT11: JP34.2 R24.2 U12.3
OUT12: JP37.2 R26.2 U13.3
OUT13: JP40.2 R28.2 U14.3
OUT14: JP43.2 R30.2 U15.3
OUT15: JP46.2 R32.2 U16.3
OUT16: JP49.2 R34.2 U17.3
OUT17: JP52.2 R36.2 U18.3
OUT18: JP55.2 R38.2 U19.3
OUT19: JP58.2 R40.2 U20.3
OUT20: JP61.2 R42.2 U21.3
OUT21: JP64.2 R44.2 U22.3
OUT22: JP67.2 R46.2 U23.3
OUT23: JP70.2 R48.2 U24.3
OUT24: JP73.2 R50.2 U25.3
OUT25: JP76.2 R52.2 U26.3
OUT26: JP79.2 R54.2 U27.3
OUT27: JP82.2 R56.2 U28.3
OUT28: JP85.2 R58.2 U29.3
OUT29: JP88.2 R60.2 U30.3
OUT30: JP91.2 R62.2 U31.3
OUT31: JP94.2 R64.2 U32.3
OUT32: JP97.2 R66.2 U33.3
OUT33: JP100.2 R68.2 U34.3
OUT34: JP103.2 R70.2 U35.3
OUT35: JP106.2 R72.2 U36.3
OUT36: JP109.2 R74.2 U37.3
OUT37: JP112.2 R76.2 U38.3
OUT38: JP115.2 R78.2 U39.3
OUT39: JP118.2 R80.2 U40.3
OUT40: JP121.2 R82.2 U41.3
OUT41: JP124.2 R84.2 U42.3
OUT42: JP127.2 R86.2 U43.3
OUT43: JP130.2 R88.2 U44.3
OUT44: JP133.2 R90.2 U45.3
OUT45: JP136.2 R92.2 U46.3
OUT46: JP139.2 R94.2 U47.3
OUT47: JP142.2 R96.2 U48.3
OUT48: JP145.2 R98.2 U49.3
OUT49: JP148.2 R100.2 U50.3
OUT50: JP151.2 R102.2 U51.3
OUT51: JP154.2 R104.2 U52.3
OUT52: JP157.2 R106.2 U53.3
OUT53: JP160.2 R108.2 U54.3
OUT54: JP163.2 R110.2 U55.3
OUT55: JP166.2 R112.2 U56.3
OUT56: JP169.2 R114.2 U57.3
OUT57: JP172.2 R116.2 U58.3
OUT58: JP175.2 R118.2 U59.3
OUT59: JP178.2 R120.2 U60.3
OUT60: JP181.2 R122.2 U61.3
OUT61: JP184.2 R124.2 U62.3
OUT62: JP187.2 R126.2 U63.3
OUT63: JP190.2 R128.2 U64.3
OUT64: JP193.2 R130.2 U65.3
OUT65: JP196.2 R132.2 U66.3
OUT66: JP199.2 R134.2 U67.3
OUT67: JP202.2 R136.2 U68.3
OUT68: JP205.2 R138.2 U69.3
OUT69: JP208.2 R140.2 U70.3
OUT70: JP211.2 R142.2 U71.3
OUT71: JP214.2 R144.2 U72.3
VCC: JP1.1 R1.2 R2.1
VCC1: JP4.1 R3.2 R4.1
VCC2: JP7.1 R5.2 R6.1
VCC3: JP10.1 R7.2 R8.1
VCC4: JP13.1 R9.2 R10.1
VCC5: JP16.1 R11.2 R12.1
VCC6: JP19.1 R13.2 R14.1
VCC7: JP22.1 R15.2 R16.1
VCC8: JP25.1 R17.2 R18.1
VCC9: JP28.1 R19.2 R20.1
VCC10: JP31.1 R21.2 R22.1
VCC11: JP34.1 R23.2 R24.1
VCC12: JP37.1 R25.2 R26.1
VCC13: JP40.1 R27.2 R28.1
VCC14: JP43.1 R29.2 R30.1
VCC15: JP46.1 R31.2 R32.1
VCC16: JP49.1 R33.2 R34.1
VCC17: JP52.1 R35.2 R36.1
VCC18: JP55.1 R37.2 R38.1
VCC19: JP58.1 R39.2 R40.1
VCC20: JP61.1 R41.2 R42.1
VCC21: JP64.1 R43.2 R44.1
VCC22: JP67.1 R45.2 R46.1
VCC23: JP70.1 R47.2 R48.1
VCC24: JP73.1 R49.2 R50.1
VCC25: JP76.1 R51.2 R52.1
VCC26: JP79.1 R53.2 R54.1
VCC27: JP82.1 R55.2 R56.1
VCC28: JP85.1 R57.2 R58.1
VCC29: JP88.1 R59.2 R60.1
VCC30: JP91.1 R61.2 R62.1
VCC31: JP94.1 R63.2 R64.1
VCC32: JP97.1 R65.2 R66.1
VCC33: JP100.1 R67.2 R68.1
VCC34: JP103.1 R69.2 R70.1
VCC35: JP106.1 R71.2 R72.1
VCC36: JP109.1 R73.2 R74.1
VCC37: JP112.1 R75.2 R76.1
VCC38: JP115.1 R77.2 R78.1
VCC39: JP118.1 R79.2 R80.1
VCC40: JP121.1 R81.2 R82.1
VCC41: JP124.1 R83.2 R84.1
VCC42: JP127.1 R85.2 R86.1
VCC43: JP130.1 R87.2 R88.1
VCC44: JP133.1 R89.2 R90.1
VCC45: JP136.1 R91.2 R92.1
VCC46: JP139.1 R93.2 R94.1
VCC47: JP142.1 R95.2 R96.1
VCC48: JP145.1 R97.2 R98.1
VCC49: JP148.1 R99.2 R100.1
VCC50: JP151.1 R101.2 R102.1
VCC51: JP154.1 R103.2 R104.1
VCC52: JP157.1 R105.2 R106.1
VCC53: JP160.1 R107.2 R108.1
VCC54: JP163.1 R109.2 R110.1
VCC55: JP166.1 R111.2 R112.1
VCC56: JP169.1 R113.2 R114.1
VCC57: JP172.1 R115.2 R116.1
VCC58: JP175.1 R117.2 R118.1
VCC59: JP178.1 R119.2 R120.1
VCC60: JP181.1 R121.2 R122.1
VCC61: JP184.1 R123.2 R124.1
VCC62: JP187.1 R125.2 R126.1
VCC63: JP190.1 R127.2 R128.1
VCC64: JP193.1 R129.2 R130.1
VCC65: JP196.1 R131.2 R132.1
VCC66: JP199.1 R133.2 R134.1
VCC67: JP202.1 R135.2 R136.1
VCC68: JP205.1 R137.2 R138.1
VCC69: JP208.1 R139.2 R140.1
VCC70: JP211.1 R141.2 R142.1
VCC71: JP214.1 R143.2 R144.1